# EAGLE board InkTime_board (EAGLE 9.7.0)
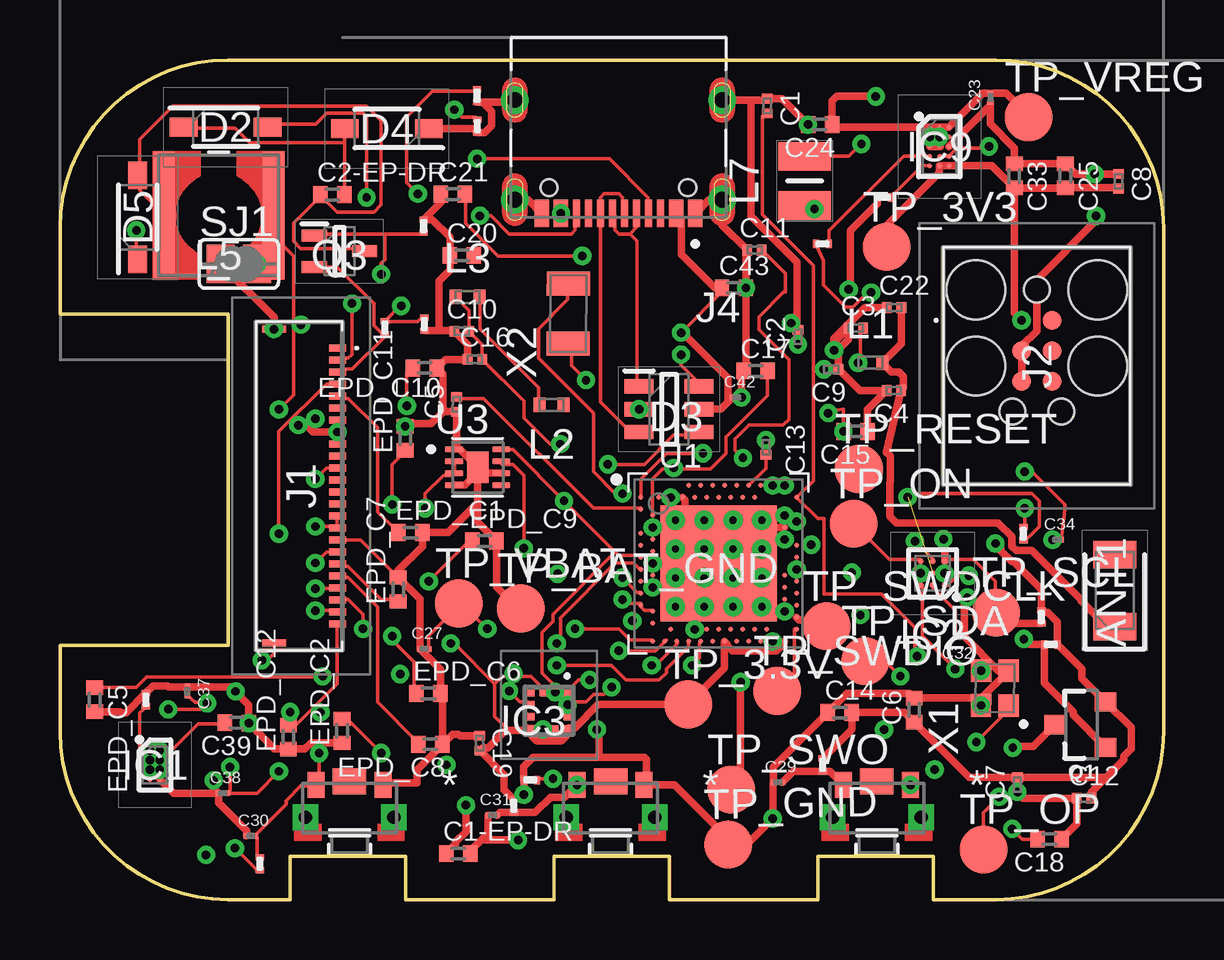
[diagram p0: board, top side]
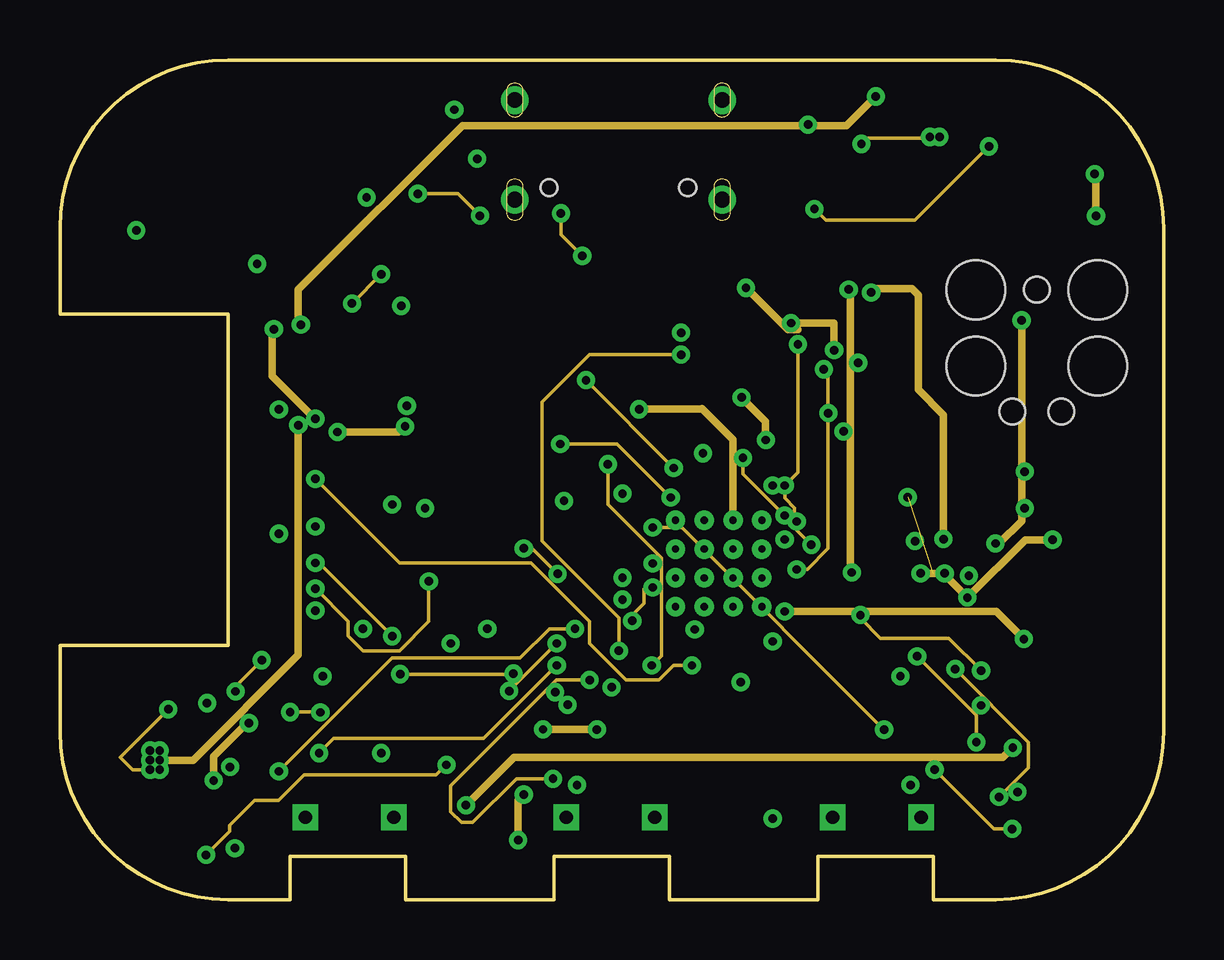
[diagram p1: board, inner layer Route2]
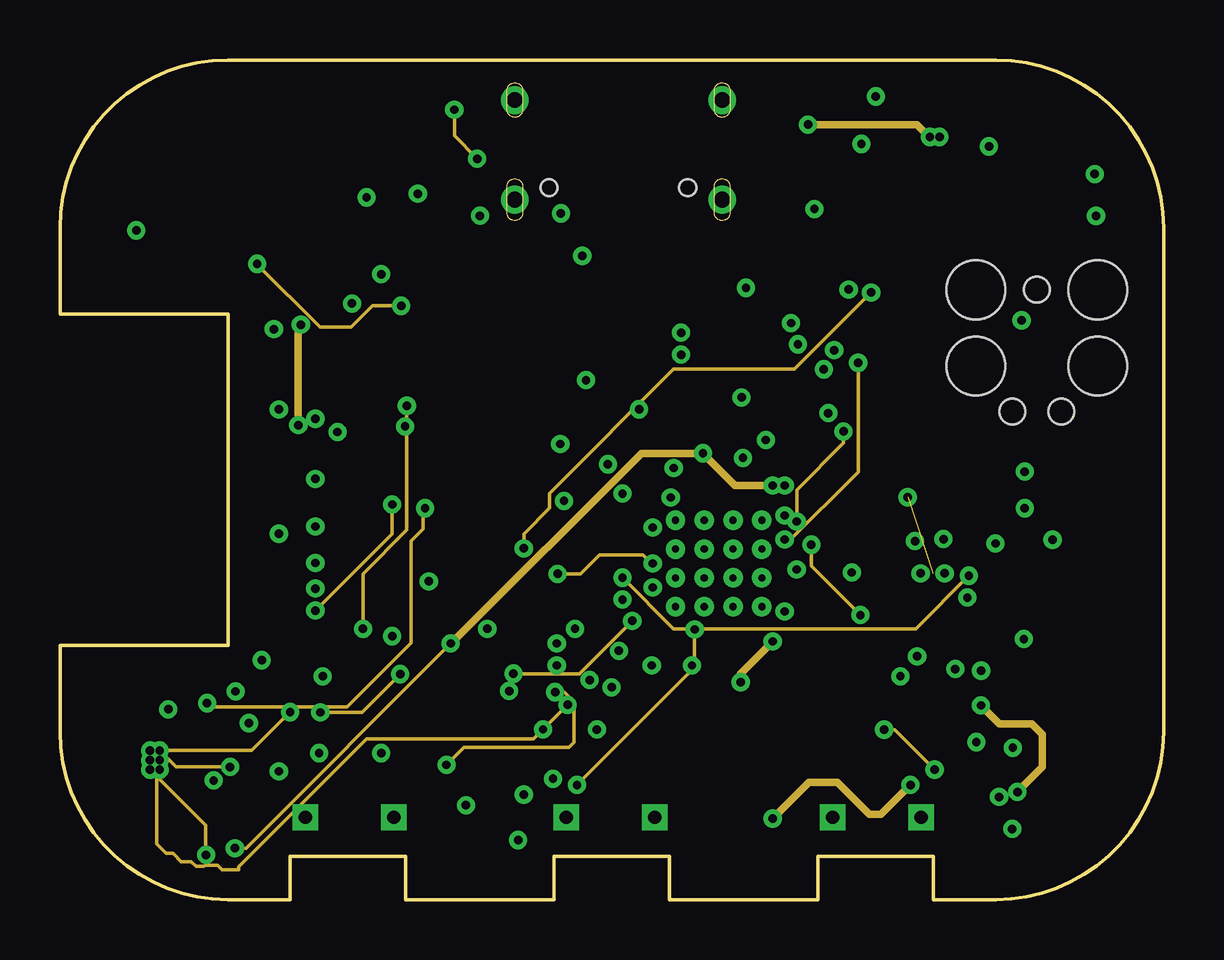
[diagram p2: board, inner layer Route15]
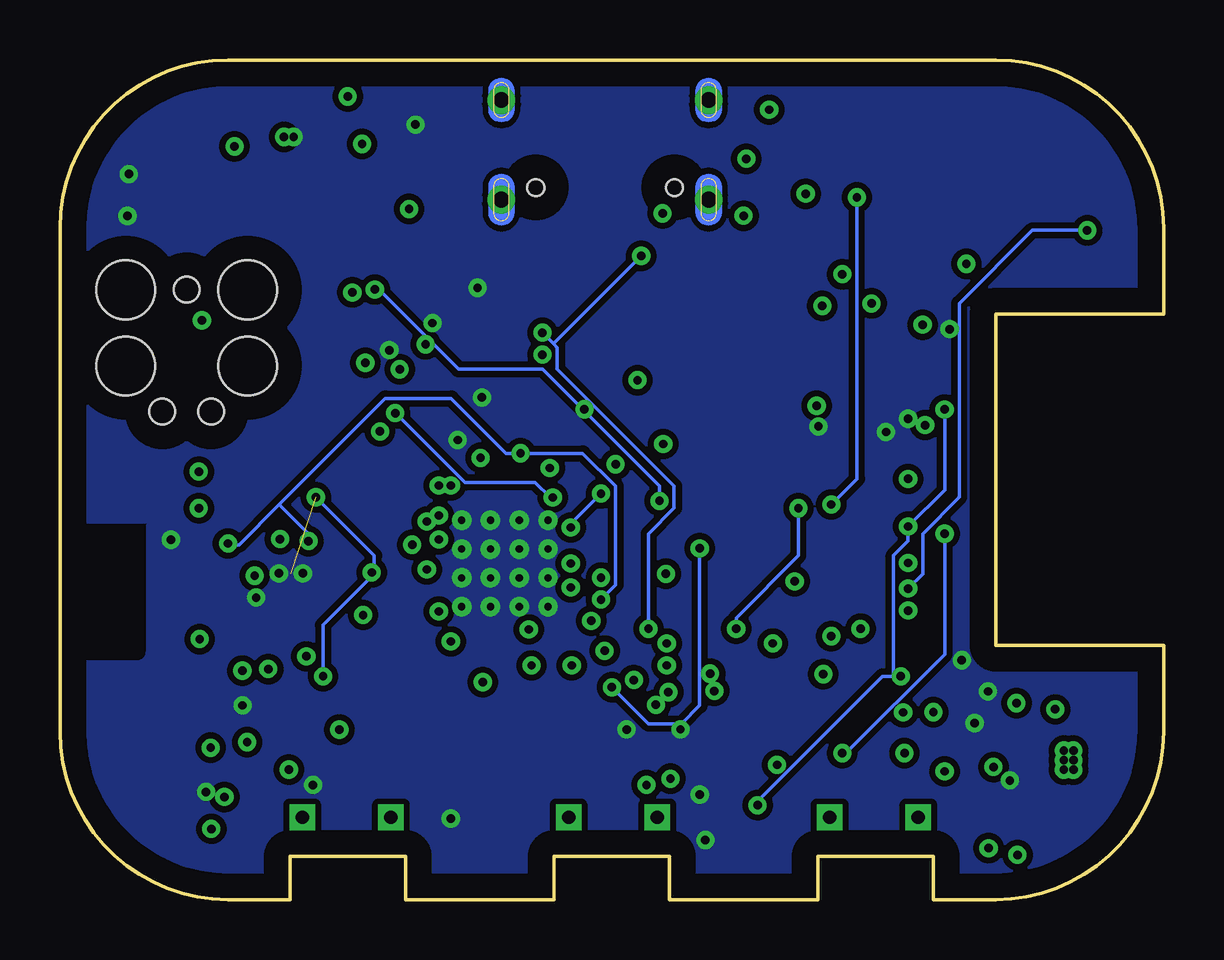
[diagram p3: board, bottom side, seen from below]

Size 46 x 35 mm. Coordinates in mm from the lower left corner, seen from the top.
Outline: 39,0 36.4,0 36.4,1.8 31.6,1.8 31.6,0 25.4,0 25.4,1.8 20.6,1.8 20.6,0 14.4,0 14.4,1.8 9.6,1.8 9.6,0 7,0 arc-90 0,7 0,10.6 7,10.6 7,24.4 0,24.4 0,28 arc-90 7,35 39,35 arc-90 46,28 46,7 arc-90 39,0
Copper layers (1+2*15+16): Top 0.035mm / dielectric 1.5mm / Route2 0.035mm / dielectric 0.15mm / Route15 0.035mm / dielectric 0.2mm / Bottom 0.035mm
Design rules "Fusion Electronics Design Rules *": minimum track width 6mil, minimum drill 0.35mm, track to track 6mil, track to pad 6mil, pad to pad 6mil, via to via 6mil, smd to smd 6mil, copper to edge 40mil, drill to drill 6mil, minimum pad ring 10mil, minimum via ring 8mil, stop-mask expansion 4mil, vias tented up to drill 9999mil, thermal gap 10mil

## Footprints (pad centres in the part's own frame; a part is rotated, then mirrored left to right if it is on the bottom)
2450AT18B100E_ANTC3216X140N = smd 1.15 x 1.8: 1 -1.5,0; 2 1.5,0
NORDIC_NRF_3_RESC0201_N = smd 0.4 x 0.45: 1 -0.305,0; 2 0.305,0
PERFECT_0402_0402 = smd 0.6 x 0.7: 1 -0.5,0; 2 0.5,0
GRM011R60J152KE01L_2_CAPC0201X13N = smd 0.22 x 0.23: 1 -0.185,0; 2 0.185,0
ESP32_C6_LIBRARY_5_SOD3716X135N = smd 1.15 x 0.8: 1 -1.75,0; 2 1.75,0
ESP32_C6_LIBRARY_3_SOT95P280X145-6N = smd 1.2 x 0.6: 1 -1.25,0.95; 2 -1.25,0; 3 -1.25,-0.95; 4 1.25,-0.95; 5 1.25,0; 6 1.25,0.95
BQ25180YBGR_BGA8C40P2X4_100X155X50 = smd 0.2 x 0.2: A1 -0.2,0.6; A2 0.2,0.6; B1 -0.2,0.2; B2 0.2,0.2; C1 -0.2,-0.2; C2 0.2,-0.2; D1 -0.2,-0.6; D2 0.2,-0.6
DRV2605YZFR_BGA9C50P3X3_144X144X62 = smd 0.25 x 0.25: A1 -0.5,0.5; A2 0,0.5; A3 0.5,0.5; B1 -0.5,0; B2 0,0; B3 0.5,0; C1 -0.5,-0.5; C2 0,-0.5; C3 0.5,-0.5
BMA423_BMA423 = smd 0.3 x 0.35: 1 -0.75,-0.775; 2 -0.25,-0.775; 3 0.25,-0.775; 4 0.75,-0.775; 7 0.75,0.775; 8 0.25,0.775; 9 -0.25,0.775; 10 -0.75,0.775 | smd 0.35 x 0.3: 5 0.775,-0.25; 6 0.775,0.25; 11 -0.775,0.25; 12 -0.775,-0.25
RT6160AWSC_BGA15C40P3X5_140X230X60 = smd 0.216 x 0.216: A1 -0.4,0.8; A2 0,0.8; A3 0.4,0.8; B1 -0.4,0.4; B2 0,0.4; B3 0.4,0.4; C1 -0.4,0; C2 0,0; C3 0.4,0; D1 -0.4,-0.4; D2 0,-0.4; D3 0.4,-0.4; E1 -0.4,-0.8; E2 0,-0.8; E3 0.4,-0.8
503480-2400_5034802400 = smd 0.3 x 0.7: 1 -5.75,1.525; 2 -5.25,1.525; 3 -4.75,1.525; 4 -4.25,1.525; 5 -3.75,1.525; 6 -3.25,1.525; 7 -2.75,1.525; 8 -2.25,1.525; 9 -1.75,1.525; 10 -1.25,1.525; 11 -0.75,1.525; 12 -0.25,1.525; 13 0.25,1.525; 14 0.75,1.525; 15 1.25,1.525; 16 1.75,1.525; 17 2.25,1.525; 18 2.75,1.525; 19 3.25,1.525; 20 3.75,1.525; 21 4.25,1.525; 22 4.75,1.525; 23 5.25,1.525; 24 5.75,1.525 | smd 0.3 x 1: MP1 -6.54,-1.125; MP2 6.54,-1.125
TC2030-IDC_TC2030IDC = smd 0.783 x 0.783: 1 -0.953,-0.635; 2 -0.953,0.635; 3 0.317,-0.635; 4 0.317,0.635; 5 1.588,-0.635; 6 1.588,0.635 | hole 2.451: -2.223,-2.54; -2.223,2.54; 0.952,-2.54; 0.952,2.54 | hole 1.067: -2.223,0; 2.857,-1.016; 2.857,1.016
KH-TYPE-C-16P_KINGHELM_KH-TYPE-C-16P = smd 0.6 x 1.15: A1_B12 -3.2,4.725; A4_B9 -2.4,4.725; A9_B4 2.4,4.725; A12_B1 3.2,4.725 | smd 0.3 x 1.15: A5 -1.25,4.725; A6 -0.25,4.725; A7 0.25,4.725; A8 1.25,4.725; B5 1.75,4.725; B6 0.75,4.725; B7 -0.75,4.725; B8 -1.75,4.725 | drill 0.65 pad 1.05: SH1 -4.32,0; SH2 4.32,0; SH3 -4.32,4.15; SH4 4.32,4.15 | hole 0.7: -2.89,3.65; 2.89,3.65
NORDIC_NRF_2_RESC0402_L = smd 0.5 x 0.6: 1 -0.5,0; 2 0.5,0
ESP32_C6_LIBRARY_2_IND_4828-WE-TPC_WRE = smd 0.9 x 5.3: 1 -2.286,0; 2 2.286,0
MLP2016SR47MT0S1_INDC2016X100N = smd 1.2 x 2.2: 1 -1.028,0; 2 1.028,0
ESP32_C6_LIBRARY_4_ESP32_C6_LIBRARY_4_ESP32_C6_LIBRARY_4_ESP32_C6_LIBRARY_4_ESP32_WROVER_SPARKFUN-DISCRETESEMI_SOT23-3 = smd 0.8 x 0.9: 1 -0.95,-1; 2 0.95,-1; 3 0,1.1
ESP32_C6_LIBRARY_6_SOT65P210X110-3N = smd 1.05 x 0.5: 1 -1.05,0.65; 2 -1.05,-0.65; 3 1.05,0
CPF0201D7K68C1_0201 = smd 0.35 x 0.25: 1 0,0.275; 2 0,-0.275
ESP32_C6_LIBRARY_7_JUMPER_SJ = smd 1.168 x 1.6: 1 -0.762,0; 2 0.762,0
2025-10-22_07-23-44_LIBRARY_SW_EVP-AKE31A_PAN = smd 0.711 x 1.092: 1 -1.4,-0.972; 2 1.4,-0.972 | drill 0.559 pad 0.914 square: 3 -1.848,0.381; 4 1.848,0.381 | smd 1.397 x 1.092: 5 0,-1.124
HECTOR_WATCH_1_TP20R = smd 2 x 2: TP 0,0
NORDIC_NRF_4_AQFN50P700X700X85_HS-74N = smd 4.85 x 4.85: P$74 0,0 | drill 0.3 pad 0.6: P$75 -1.8,1.8; P$76 -0.6,1.8; P$77 0.6,1.8; P$78 1.8,1.8; P$79 -1.8,0.6; P$80 -0.6,0.6; P$81 0.6,0.6; P$82 1.8,0.6; P$83 -1.8,-0.6; P$84 -0.6,-0.6; P$85 0.6,-0.6; P$86 1.8,-0.6; P$87 -1.8,-1.8; P$88 -0.6,-1.8; P$89 0.6,-1.8; P$90 1.8,-1.8 | smd 0.2 x 0.2: P$A8 -1.25,3.25; P$A10 -0.75,3.25; P$A12 -0.25,3.25; P$A14 0.25,3.25; P$A16 0.75,3.25; P$A18 1.25,3.25; P$A20 1.75,3.25; P$A22 2.25,3.25; P$A23 2.75,3.25; P$AA24 3.25,-2.25; P$AB2 -2.75,-2.5; P$AC5 -2,-2.75; P$AC9 -1,-2.75; P$AC11 -0.5,-2.75; P$AC13 0,-2.75; P$AC15 0.5,-2.75; P$AC17 1,-2.75; P$AC19 1.5,-2.75; P$AC21 2,-2.75; P$AC24 3.25,-2.75; P$AD2 -2.75,-3.25; P$AD4 -2.25,-3.25; P$AD6 -1.75,-3.25; P$AD8 -1.25,-3.25; P$AD10 -0.75,-3.25; P$AD12 -0.25,-3.25; P$AD14 0.25,-3.25; P$AD16 0.75,-3.25; P$AD18 1.25,-3.25; P$AD20 1.75,-3.25; P$AD22 2.25,-3.25; P$AD23 2.75,-3.25; P$B1 -3.25,2.75; P$B3 -2.5,2.75; P$B5 -2,2.75; P$B7 -1.5,2.75; P$B9 -1,2.75; P$B11 -0.5,2.75; P$B13 0,2.75; P$B15 0.5,2.75; P$B17 1,2.75; P$B19 1.5,2.75; P$B24 3.25,2.75; P$C1 -3.25,2.25; P$D2 -2.75,2; P$D23 2.75,2; P$E24 3.25,1.75; P$F2 -2.75,1.5; P$F23 2.75,1.5; P$G1 -3.25,1.25; P$H2 -2.75,1; P$H23 2.75,1; P$J1 -3.25,0.75; P$J24 3.25,0.75; P$K2 -2.75,0.5; P$L1 -3.25,0.25; P$L24 3.25,0.25; P$M2 -2.75,0; P$N1 -3.25,-0.25; P$N24 3.25,-0.25; P$P2 -2.75,-0.5; P$P23 2.75,-0.5; P$R1 -3.25,-0.75; P$R24 3.25,-0.75; P$T2 -2.75,-1; P$T23 2.75,-1; P$U1 -3.25,-1.25; P$U24 3.25,-1.25; P$V23 2.75,-1.5; P$W1 -3.25,-1.75; P$W24 3.25,-1.75; P$Y2 -2.75,-2; P$Y23 2.75,-2
ESP32_C6_LIBRARY_SON50P200X200X80-9N = smd 0.76 x 0.27: 1 -0.985,0.75; 2 -0.985,0.25; 3 -0.985,-0.25; 4 -0.985,-0.75; 5 0.985,-0.75; 6 0.985,-0.25; 7 0.985,0.25; 8 0.985,0.75 | smd 0.9 x 1.3: 9 0,0
NORDIC_NRF_BT-XTAL_2016_N = smd 0.95 x 0.85: 1 -0.725,-0.575; 2 0.725,-0.575; 3 0.725,0.575; 4 -0.725,0.575
NORDIC_NRF_1_XTAL_3215_N = smd 1 x 1.8: 1 -1.25,0; 2 1.25,0

## Placement (x,y rotation side)
ANT1  2450AT18B100E_2450AT18B100E  [2450AT18B100E_ANTC3216X140N]  43.97,12.88 90 top
C1  12pF  [NORDIC_NRF_3_RESC0201_N]  29.48,33.08 270 top
C1-EP-DR  10uF  [PERFECT_0402_0402]  16.6,1.92 0 top
C2  12pF  [NORDIC_NRF_3_RESC0201_N]  30.76,23.45 90 top
C2-EP-DR  4.7uF/25V  [PERFECT_0402_0402]  11.35,29.39 0 top
C3  1pF  [NORDIC_NRF_3_RESC0201_N]  33.17,23.82 0 top
C4  1pF  [NORDIC_NRF_3_RESC0201_N]  34.76,21.22 180 top
C5  100nF  [NORDIC_NRF_3_RESC0201_N]  16.53,20.65 89.6 top
C6  4.7µF  [PERFECT_0402_0402]  35.6,7.9 90 top
C7  100nF  [NORDIC_NRF_3_RESC0201_N]  39.91,4.79 90 top
C8  100nF  [NORDIC_NRF_3_RESC0201_N]  44.13,29.94 270 top
C9  820pF  [NORDIC_NRF_3_RESC0201_N]  32.14,22.11 180 top
C10  N.C.  [NORDIC_NRF_3_RESC0201_N]  16.75,23.69 0 top
C11  100pF  [NORDIC_NRF_3_RESC0201_N]  28.95,27.07 0 top
C12  100nF  [NORDIC_NRF_3_RESC0201_N]  42.68,4.23 0 top
C13  N.C.  [NORDIC_NRF_3_RESC0201_N]  29.42,18.85 270 top
C14  4.7µF  [PERFECT_0402_0402]  32.51,7.8 0 top
C15  1.0µF  [PERFECT_0402_0402]  33.16,19.52 180 top
C16  47nF  [NORDIC_NRF_3_RESC0201_N]  17.3,22.52 0 top
C17  12pF  [PERFECT_0402_0402]  29,22.04 0 top
C18  12pF  [PERFECT_0402_0402]  41.25,2.52 180 top
C19  100nF  [NORDIC_NRF_3_RESC0201_N]  17.5,6.52 270.7 top
C20  4.7µF  [PERFECT_0402_0402]  16.75,26.86 0 top
C21  4.7µF  [PERFECT_0402_0402]  16.38,29.41 0 top
C22  N.C.  [NORDIC_NRF_3_RESC0201_N]  34.77,24.68 0 top
C23  0.1uF  [GRM011R60J152KE01L_2_CAPC0201X13N]  38.78,33.42 90 top
C24  10uF  [PERFECT_0402_0402]  31.68,32.31 180 top
C25  22uF  [PERFECT_0402_0402]  41.91,30.17 270 top
C27  0.1uF  [GRM011R60J152KE01L_2_CAPC0201X13N]  15.19,10.45 0 top
C29  1uF  [GRM011R60J152KE01L_2_CAPC0201X13N]  29.93,4.88 1.1 top
C30  1uF  [GRM011R60J152KE01L_2_CAPC0201X13N]  7.96,2.65 0 top
C31  1uF  [GRM011R60J152KE01L_2_CAPC0201X13N]  18.04,3.51 0 top
C32  1uF  [GRM011R60J152KE01L_2_CAPC0201X13N]  37.51,10.96 180 top
C33  22uF  [PERFECT_0402_0402]  39.78,30.16 270 top
C34  0.1uF  [GRM011R60J152KE01L_2_CAPC0201X13N]  41.56,15 0 top
C37  1uF  [GRM011R60J152KE01L_2_CAPC0201X13N]  5.31,8.69 270 top
C38  1uF  [GRM011R60J152KE01L_2_CAPC0201X13N]  6.79,4.43 0 top
C39  10uF  [PERFECT_0402_0402]  7.37,7.36 178.8 top
C42  0.1uF  [GRM011R60J152KE01L_2_CAPC0201X13N]  28.22,20.93 0 top
C43  4.7uF  [PERFECT_0402_0402]  28.09,25.5 0 top
D2  MBR0530  [ESP32_C6_LIBRARY_5_SOD3716X135N]  6.91,32.2 0 top
D3  USBLC6-2SC6Y  [ESP32_C6_LIBRARY_3_SOT95P280X145-6N]  25.39,20.44 0 top
D4  MBR0530  [ESP32_C6_LIBRARY_5_SOD3716X135N]  13.63,32.14 180 top
D5  MBR0530  [ESP32_C6_LIBRARY_5_SOD3716X135N]  3.25,28.44 90 top
EPD_C1  1uF/50V  [PERFECT_0402_0402]  14.61,15.3 0 top
EPD_C2  1uF/50V  [PERFECT_0402_0402]  11.76,7.03 90 top
EPD_C5  0.1uF/50V  [PERFECT_0402_0402]  1.45,8.33 270 top
EPD_C6  1uF/50V  [PERFECT_0402_0402]  15.35,8.6 0 top
EPD_C7  1uF/50V  [PERFECT_0402_0402]  14.1,12.93 90 top
EPD_C8  1uF/50V  [PERFECT_0402_0402]  15.44,6.47 180 top
EPD_C9  1uF/50V  [PERFECT_0402_0402]  17.69,14.95 0 top
EPD_C10  1uF/50V  [PERFECT_0402_0402]  15.21,22.16 180 top
EPD_C11  1uF/50V  [PERFECT_0402_0402]  14.39,19.23 90 top
EPD_C12  1uF/50V  [PERFECT_0402_0402]  9.52,6.77 90 top
IC1  BQ25180YBGR  [BQ25180YBGR_BGA8C40P2X4_100X155X50]  3.96,5.61 0 top
IC2  DRV2605YZFR  [DRV2605YZFR_BGA9C50P3X3_144X144X62]  36.38,13.6 180 top
IC3  BMA423  [BMA423_BMA423]  20.39,7.87 179.9 top
IC9  RT6160AWSC  [RT6160AWSC_BGA15C40P3X5_140X230X60]  36.66,31.39 0 top
J1  503480-2400  [503480-2400_5034802400]  10.04,17.24 270 top
J2  TC2030-IDC  [TC2030-IDC_TC2030IDC]  40.72,23.19 270 top
J4  KH-TYPE-C-16P  [KH-TYPE-C-16P_KINGHELM_KH-TYPE-C-16P]  23.28,33.33 180 top
L1  3.9nH  [NORDIC_NRF_2_RESC0402_L]  33.77,22.38 0 top
L2  3.9nH  [NORDIC_NRF_2_RESC0402_L]  20.48,20.62 180 top
L3  3.9nH  [NORDIC_NRF_2_RESC0402_L]  16.99,25.12 0 top
L5  68uH  [ESP32_C6_LIBRARY_2_IND_4828-WE-TPC_WRE]  6.61,28.52 180 top
L7  FTC252012SR47MBCA  [MLP2016SR47MT0S1_INDC2016X100N]  31.04,29.95 270 top
Q1  20V/4.2A/52mΩ/1.4W  [ESP32_C6_LIBRARY_4_ESP32_C6_LIBRARY_4_ESP32_C6_LIBRARY_4_ESP32_C6_LIBRARY_4_ESP32_WROVER_SPARKFUN-DISCRETESEMI_SOT23-3]  42.58,7.29 90 top
Q3  SI1308EDL-T1-GE3  [ESP32_C6_LIBRARY_6_SOT65P210X110-3N]  11.65,27.02 0 top
R1_EP_DR  0.47  [CPF0201D7K68C1_0201]  13.54,23.84 0 top
R1_USB  5K1  [CPF0201D7K68C1_0201]  17.39,32.23 0 top
R2  0  [CPF0201D7K68C1_0201]  34.36,29.28 90 top
R2_EP_DR  10K  [CPF0201D7K68C1_0201]  15.16,28.07 0 top
R2_USB  5K1  [CPF0201D7K68C1_0201]  17.38,33.51 0 top
R3  0  [CPF0201D7K68C1_0201]  19.61,4.99 90 top
R4  0  [CPF0201D7K68C1_0201]  31.78,27.33 90 top
R5  10K  [CPF0201D7K68C1_0201]  8.33,1.49 0 top
R7  10K  [CPF0201D7K68C1_0201]  31.8,5.62 180 top
R8  10K  [CPF0201D7K68C1_0201]  18.91,3.9 180.5 top
R9  10K  [CPF0201D7K68C1_0201]  3.58,8.33 0 top
R17  3K3  [CPF0201D7K68C1_0201]  40.91,11.78 0 top
R18  3K3  [CPF0201D7K68C1_0201]  40.16,15.25 0 top
R_PWR_EPD  10K  [CPF0201D7K68C1_0201]  41.31,10.63 90 top
R_TYPE_SEL  2.2  [CPF0201D7K68C1_0201]  15.19,23.98 180.7 top
SJ1  [ESP32_C6_LIBRARY_7_JUMPER_SJ]  7.46,26.5 0 top
SW_DN  2025-10-22_07-23-44_LIBRARY_EVP-AKE31ASW_EVP-AKE31A_PAN  [2025-10-22_07-23-44_LIBRARY_SW_EVP-AKE31A_PAN]  34.05,3.81 180 top
SW_ENT  2025-10-22_07-23-44_LIBRARY_EVP-AKE31ASW_EVP-AKE31A_PAN  [2025-10-22_07-23-44_LIBRARY_SW_EVP-AKE31A_PAN]  22.95,3.81 180 top
SW_UP  2025-10-22_07-23-44_LIBRARY_EVP-AKE31ASW_EVP-AKE31A_PAN  [2025-10-22_07-23-44_LIBRARY_SW_EVP-AKE31A_PAN]  12.07,3.81 180 top
TP_3.3V  HECTOR_WATCH_1_TPTP20R  [HECTOR_WATCH_1_TP20R]  26.18,8.14 0 top
TP_3V3  HECTOR_WATCH_1_TPTP20R  [HECTOR_WATCH_1_TP20R]  34.45,27.2 0 top
TP_BAT_GND  HECTOR_WATCH_1_TPTP20R  [HECTOR_WATCH_1_TP20R]  19.21,12.14 0 top
TP_GND  HECTOR_WATCH_1_TPTP20R  [HECTOR_WATCH_1_TP20R]  27.85,2.3 1 top
TP_ON  HECTOR_WATCH_1_TPTP20R  [HECTOR_WATCH_1_TP20R]  33.08,15.66 0 top
TP_OP  HECTOR_WATCH_1_TPTP20R  [HECTOR_WATCH_1_TP20R]  38.49,2.09 0 top
TP_RESET  HECTOR_WATCH_1_TPTP20R  [HECTOR_WATCH_1_TP20R]  33.3,17.95 0 top
TP_SCL  HECTOR_WATCH_1_TPTP20R  [HECTOR_WATCH_1_TP20R]  39.02,11.97 0 top
TP_SDA  HECTOR_WATCH_1_TPTP20R  [HECTOR_WATCH_1_TP20R]  33.56,9.95 0 top
TP_SWDCLK  HECTOR_WATCH_1_TPTP20R  [HECTOR_WATCH_1_TP20R]  31.96,11.39 0 top
TP_SWDIO  HECTOR_WATCH_1_TPTP20R  [HECTOR_WATCH_1_TP20R]  29.9,8.7 0 top
TP_SWO  HECTOR_WATCH_1_TPTP20R  [HECTOR_WATCH_1_TP20R]  27.98,4.58 0 top
TP_VBAT  HECTOR_WATCH_1_TPTP20R  [HECTOR_WATCH_1_TP20R]  16.63,12.34 0 top
TP_VREG  HECTOR_WATCH_1_TPTP20R  [HECTOR_WATCH_1_TP20R]  40.37,32.61 0 top
U1  NORDIC_NRF_4_NRF52840_QF  [NORDIC_NRF_4_AQFN50P700X700X85_HS-74N]  27.46,14.01 0 top
U3  MAX17048G+T10  [ESP32_C6_LIBRARY_SON50P200X200X80-9N]  17.41,18.02 0 top
X1  32MHz  [NORDIC_NRF_BT-XTAL_2016_N]  38.97,8.82 89.7 top
X2  32.768kHz  [NORDIC_NRF_1_XTAL_3215_N]  21.18,24.42 89.7 top

## Library data of the parts
ANT1 = InkTime_v5; ARROW_PART_NUMBER: 2450AT18B100E; ARROW_PRICE-STOCK: https://www.arrow.com/en/products/2450at18b100e/johanson-dielectrics?utm_currency=USD&region=nac; DESCRIPTION: Antennas 2.45GHz ANTENNA; HEIGHT: 1.4mm; MANUFACTURER_NAME: JOHANSON TECHNOLOGY; MANUFACTURER_PART_NUMBER: 2450AT18B100E; MOUSER_PART_NUMBER: 609-2450AT18B100E; MOUSER_PRICE-STOCK: https://www.mouser.co.uk/ProductDetail/Johanson-Technology/2450AT18B100E?qs=yCnrNFeXz%252Bh5MFsFIXGZGA%3D%3D
C1 C1-EP-DR C2 C2-EP-DR C3-C22 C24 C25 C33 C39 C43 EPD_C1 EPD_C2 EPD_C5-EPD_C12 L1-L3 R1_EP_DR R1_USB R2 R2_EP_DR R2_USB R3-R5 R7-R9 R17 R18 R_PWR_EPD R_TYPE_SEL SJ1 TP_3.3V TP_3V3 TP_BAT_GND TP_GND TP_ON TP_OP TP_RESET TP_SCL TP_SDA TP_SWDCLK TP_SWDIO TP_SWO TP_VBAT TP_VREG U1 X1 X2 = InkTime_v5
C23 C27 C29-C32 C34 C37 C38 C42 = InkTime_v5; AVAILABILITY: In Stock; CHECK_PRICES: https://www.snapeda.com/parts/GRM011R60J152KE01L/Murata/view-part/?ref=eda; DESCRIPTION: SMD Capacitor X5R(EIA) with Capacitance: 1500pF Tol. 10%. Rated Voltage: 6.3Vdc; MF: Murata; MP: GRM011R60J152KE01L; PACKAGE: 0201 Murata; PRICE: None; SNAPEDA_LINK: https://www.snapeda.com/parts/GRM011R60J152KE01L/Murata/view-part/?ref=snap
D2 D4 D5 = InkTime_v5; AVAILABILITY: In Stock; CHECK_PRICES: https://www.snapeda.com/parts/MBR0530/Onsemi/view-part/?ref=eda; DESCRIPTION: Diode Schottky 30 V 500mA Surface Mount SOD-123; MF: ON Semiconductor; MP: MBR0530; PACKAGE: SOD-123-2 ON Semiconductor; PRICE: None; PURCHASE-URL: https://www.snapeda.com/api/url_track_click_mouser/?unipart_id=179458&manufacturer=ON Semiconductor&part_name=MBR0530&search_term=None; SNAPEDA_LINK: https://www.snapeda.com/parts/MBR0530/Onsemi/view-part/?ref=snap
D3 = InkTime_v5; AVAILABILITY: In Stock; CHECK_PRICES: https://www.snapeda.com/parts/USBLC6-2SC6Y/STMicroelectronics/view-part/?ref=eda; DESCRIPTION: 17V Clamp 5A (8/20µs) Ipp Tvs Diode Surface Mount SOT-23-6; MF: STMicroelectronics; MP: USBLC6-2SC6Y; PACKAGE: SOT-23-6 STMicroelectronics; PRICE: None; SNAPEDA_LINK: https://www.snapeda.com/parts/USBLC6-2SC6Y/STMicroelectronics/view-part/?ref=snap
IC1 = InkTime_v5; ARROW_PART_NUMBER: BQ25180YBGR; ARROW_PRICE-STOCK: https://www.arrow.com/en/products/bq25180ybgr/texas-instruments?utm_currency=USD&region=nac; DESCRIPTION: Charger IC Lithium Ion/Polymer, Lithium Iron Phosphate 8-DSBGA (1.6x1.1); HEIGHT: 0.5mm; MANUFACTURER_NAME: Texas Instruments; MANUFACTURER_PART_NUMBER: BQ25180YBGR; MOUSER_PART_NUMBER: 595-BQ25180YBGR; MOUSER_PRICE-STOCK: https://www.mouser.co.uk/ProductDetail/Texas-Instruments/BQ25180YBGR?qs=doiCPypUmgEWjAK%252BJAX6Tw%3D%3D
IC2 = InkTime_v5; ARROW_PART_NUMBER: DRV2605YZFR; ARROW_PRICE-STOCK: https://www.arrow.com/en/products/drv2605yzfr/texas-instruments?region=nac; DESCRIPTION: Haptic Driver for ERM/LRA with Built-In Library and Smart Loop Architecture; HEIGHT: 0.625mm; MANUFACTURER_NAME: Texas Instruments; MANUFACTURER_PART_NUMBER: DRV2605YZFR
IC3 = InkTime_v5; ARROW_PART_NUMBER: BMA423; ARROW_PRICE-STOCK: https://www.arrow.com/en/products/bma423/bosch; DESCRIPTION: Accelerometers Triaxial low-g 12bit Acceleration Sensor; HEIGHT: 1mm; MANUFACTURER_NAME: BOSCH; MANUFACTURER_PART_NUMBER: BMA423; MOUSER_PART_NUMBER: 262-BMA423; MOUSER_PRICE-STOCK: https://www.mouser.co.uk/ProductDetail/Bosch-Sensortec/BMA423?qs=HXFqYaX1Q2xC%252BSgeGoX3mg%3D%3D
IC9 = InkTime_v5; DESCRIPTION: Buck-Boost Regulator Positive Output Step-Up/Step-Down I2C DC-DC Controller IC 15-WL-CSP (BSC) (1.4x2.3); HEIGHT: 0.6mm; MANUFACTURER_NAME: RICHTEK; MANUFACTURER_PART_NUMBER: RT6160AWSC; MOUSER_PART_NUMBER: 835-RT6160AWSC; MOUSER_PRICE-STOCK: https://www.mouser.co.uk/ProductDetail/Richtek/RT6160AWSC?qs=amGC7iS6iy%2FLd9PSoixZXQ%3D%3D
J1 = InkTime_v5; DESCRIPTION: FFC & FPC Connectors 0.5mm FPC RA SMT Dual Contact 24Ckt; HEIGHT: 1.87mm; MANUFACTURER_NAME: Molex; MANUFACTURER_PART_NUMBER: 503480-2400; MOUSER_PART_NUMBER: 538-503480-2400; MOUSER_PRICE-STOCK: https://www.mouser.co.uk/ProductDetail/Molex/503480-2400?qs=OAhjpuo3Vu7efIoxFh9AOw%3D%3D
J2 = InkTime_v5; DESCRIPTION: CABLE ADAPTER 6 POS; HEIGHT: 19mm; MANUFACTURER_NAME: Tag Connect; MANUFACTURER_PART_NUMBER: TC2030-IDC
J4 = InkTime_v5; AVAILABILITY: Not in stock; CHECK_PRICES: https://www.snapeda.com/parts/KH-TYPE-C-16P/Kinghelm/view-part/?ref=eda; MF: kinghelm; MP: KH-TYPE-C-16P; PACKAGE: None; PRICE: None; SNAPEDA_LINK: https://www.snapeda.com/parts/KH-TYPE-C-16P/Kinghelm/view-part/?ref=snap
L5 = InkTime_v5; COPYRIGHT: Copyright (C) 2024 Ultra Librarian. All rights reserved.; MANUFACTURER_PART_NUMBER: 744043680; MFR_NAME: Wurth Electronics
L7 = InkTime_v5; DESCRIPTION: SMD / SMT Inductors (Coils), L=0.47?H, L x W x T :; HEIGHT: 1mm; JLCPCB: https://jlcpcb.com/partdetail/6763488-FTC252012SR47MBCA/C5832368; MANUFACTURER_NAME: TDK; MANUFACTURER_PART_NUMBER: FTC252012SR47MBCA
Q1 = InkTime_v5; PROD_ID: TRAN-14388
Q3 = InkTime_v5; AVAILABILITY: In Stock; CHECK_PRICES: https://www.snapeda.com/parts/SI1308EDL-T1-GE3/Vishay+Siliconix/view-part/?ref=eda; DESCRIPTION: Si1308EDL-T1-GE3 N-channel MOSFET Transistor, 1.5 A, 30 V, 3-Pin SC-70 | Siliconix / Vishay SI1308EDL-T1-GE3; MF: Vishay Siliconix; MP: SI1308EDL-T1-GE3; PACKAGE: SOT-323 Vishay Semiconductor; PRICE: None; PURCHASE-URL: https://www.snapeda.com/api/url_track_click_mouser/?unipart_id=274603&manufacturer=Vishay Siliconix&part_name=SI1308EDL-T1-GE3&search_term=None; SNAPEDA_LINK: https://www.snapeda.com/parts/SI1308EDL-T1-GE3/Vishay+Siliconix/view-part/?ref=snap
SW_DN SW_ENT SW_UP = InkTime_v5; COPYRIGHT: Copyright (C) 2025 Ultra Librarian. All rights reserved.; DIGI-KEY_PART_NUMBER_1: P123437TR-ND; DIGI-KEY_PART_NUMBER_2: P123437CT-ND; DIGI-KEY_PART_NUMBER_3: P123437DKR-ND; MANUFACTURER_NAME: Panasonic; MANUFACTURER_PART_NUMBER: EVP-AKE31A
U3 = InkTime_v5; AVAILABILITY: In Stock; CHECK_PRICES: https://www.snapeda.com/parts/MAX17048G+T10/Analog+Devices/view-part/?ref=eda; DESCRIPTION: 3µA 1-Cell/2-Cell Fuel Gauge with ModelGauge; MF: Analog Devices; MP: MAX17048G+T10; PACKAGE: TDFN-8 Maxim; PRICE: None; PURCHASE-URL: https://www.snapeda.com/api/url_track_click_mouser/?unipart_id=329239&manufacturer=Analog Devices&part_name=MAX17048G+T10&search_term=None; SNAPEDA_LINK: https://www.snapeda.com/parts/MAX17048G+T10/Analog+Devices/view-part/?ref=snap

## Nets
3V3: C6.1 C7.2 C8.2 C12.2 C14.2 C19.2 C25.2 C33.2 C34.2 IC2.C2 IC3.3 IC3.7 IC3.10 IC9.E2 IC9.E3 J2.1 Q1.2 R5.2 R7.2 R8.2 R17.1 R18.1 R_PWR_EPD.2 TP_3.3V.TP TP_3V3.TP U1.P$A22 U1.P$AD14 U1.P$AD23 U1.P$B1 U1.P$W1 U1.P$Y2
ALERT: U1.P$J24 U3.5
D+: D3.4 U1.P$AD6
D-: D3.6 U1.P$AD4
DN: D3.1 J4.A7 J4.B7
DP: D3.3 J4.A6 J4.B6
EPD_3V3: C1-EP-DR.1 EPD_C5.1 J1.15 J1.16 L5.1 Q1.3
EPD_BUSY: J1.9 U1.P$AD12
EPD_CS: J1.12 U1.P$K2
EPD_DC: J1.11 U1.P$AD10
EPD_RST: J1.10 U1.P$AC11
GDR: J1.2 Q3.1 R2_EP_DR.2
GND: C1-EP-DR.2 C1.1 C2.2 C3.1 C4.2 C5.1 C6.2 C7.1 C8.1 C9.1 C10.1 C11.1 C12.1 C13.1 C14.1 C15.1 C16.1 C17.1 C18.1 C19.1 C20.1 C21.1 C22.1 C23.1 C24.2 C25.1 C27.1 C29.1 C30.1 C31.1 C32.1 C33.1 C34.1 C37.1 C38.1 C39.1 C42.2 C43.2 D3.2 D4.1 EPD_C1.2 EPD_C2.1 EPD_C5.2 EPD_C6.2 EPD_C7.2 EPD_C8.1 EPD_C9.2 EPD_C10.1 EPD_C11.2 EPD_C12.1 IC1.D2 IC2.B1 IC2.B3 IC3.8 IC3.9 IC9.B1 IC9.C1 IC9.C2 IC9.C3 J1.8 J1.17 J1.MP1 J1.MP2 J2.3 J2.5 J4.A1_B12 J4.A12_B1 J4.SH1 J4.SH2 J4.SH3 J4.SH4 R1_USB.2 R2_EP_DR.1 R2_USB.2 R3.1 R9.1 R_TYPE_SEL.1 SJ1.1 SW_DN.1 SW_ENT.1 SW_UP.1 TP_BAT_GND.TP TP_GND.TP U1.P$74 U1.P$75 U1.P$76 U1.P$77 U1.P$78 U1.P$79 U1.P$80 U1.P$81 U1.P$82 U1.P$83 U1.P$84 U1.P$85 U1.P$86 U1.P$87 U1.P$88 U1.P$89 U1.P$90 U1.P$B7 U1.P$F23 U3.1 U3.4 U3.6 U3.9 X1.2 X1.4
HAPTIC_EN: IC2.A1 U1.P$U1
IMU_INT1: IC3.5 U1.P$N1
IMU_INT2: IC3.6 U1.P$P2
LX1: IC9.B2 IC9.B3 L7.1
LX2: IC9.D2 IC9.D3 L7.2
MOSI: J1.14 U1.P$B13
N$1: C5.2 U1.P$C1
N$2: C17.2 U1.P$D2 X2.1
N$3: C18.2 U1.P$F2 X2.2
N$4: C9.2 U1.P$N24
N$5: ANT1.1 C4.1 C22.2 L1.2
N$6: C3.2 L1.1 U1.P$H23
N$7: C10.2 C15.2 C16.2 L3.1 U1.P$B5 U1.P$E24
N$8: C11.2 U1.P$D23
N$9: C1.2 U1.P$B24 X1.1
N$10: C2.1 U1.P$A23 X1.3
N$11: L2.2 L3.2
N$12: L2.1 U1.P$B3
N$13: IC9.D1 R4.2
N$14: IC9.E1 R2.2
N$16: U1.P$AB2
N$17: C20.2 U1.P$AC5
N$19: J4.A5 R1_USB.1
N$20: C2-EP-DR.1 D5.2 L5.2 Q3.3
N$21: IC1.D1 R9.2
N$22: C2-EP-DR.2 D2.1 D4.2
N$23: EPD_C6.1 J1.18
N$25: EPD_C2.2 J1.4
N$26: R1_EP_DR.1 R_TYPE_SEL.2 SJ1.2
N$28: IC3.1 R3.2
N$29: EPD_C7.1 J1.19
N$30: EPD_C1.1 J1.5
N$31: EPD_C8.2 J1.20
N$32: C13.2 U1.P$A18
N$33: EPD_C10.2 J1.22
N$35: EPD_C12.2 J1.24
N$36: C32.2 IC2.A2
N$41: J4.B5 R2_USB.1
OUT+: IC2.A3 TP_OP.TP
OUT-: IC2.C3 TP_ON.TP
P0.04: U1.P$J1
P0.09: U1.P$L24
P0.13: C30.2 R5.1 SW_UP.2 U1.P$AD8
P0.14: C31.2 R8.1 SW_ENT.2 U1.P$AC9
P0.19: U1.P$AC15
P0.20: U1.P$AD16
P0.21: U1.P$AC17
P0.22: U1.P$AD18
P0.23: U1.P$AC19
P0.24: U1.P$AD20
P0.25: U1.P$AC21
P0.26: U1.P$G1
P0.27: U1.P$H2
P0.28: U1.P$B11
P0.29: U1.P$A10
P0.30: U1.P$B9
P0.31: U1.P$A8
P1.01: Q1.1 R_PWR_EPD.1 U1.P$Y23
P1.02: C29.2 R7.1 SW_DN.2 U1.P$W24
P1.03: U1.P$V23
P1.04: U1.P$U24
P1.05: U1.P$T23
P1.06: U1.P$R24
P1.07: U1.P$P23
P1.09: U1.P$R1
P1.10: U1.P$A20
P1.11: U1.P$B19
P1.12: U1.P$B17
P1.13: U1.P$A16
P1.14: U1.P$B15
P1.15: U1.P$A14
PMIC_INT: IC1.A1 U1.P$T2
PREVGH: D5.1 EPD_C9.1 J1.21
PREVGL: D2.2 EPD_C11.1 J1.23
RESE: J1.3 Q3.2 R1_EP_DR.2
RESET: J2.6 TP_RESET.TP U1.P$AC13
SCK: J1.13 U1.P$A12
SCL: IC1.B1 IC2.C1 IC3.12 R4.1 R17.2 TP_SCL.TP U1.P$M2 U3.7
SDA: IC1.C1 IC2.B2 IC3.2 R2.1 R18.2 TP_SDA.TP U1.P$L1 U3.8
SWDCLK: J2.4 TP_SWDCLK.TP U1.P$AA24
SWDIO: J2.2 TP_SWDIO.TP U1.P$AC24
SWO: TP_SWO.TP U1.P$AD22
VBAT: C27.2 C37.2 IC1.C2 TP_VBAT.TP U3.2 U3.3
VBUS: C21.2 C38.2 C42.1 C43.1 D3.5 IC1.A2 J4.A4_B9 J4.A9_B4 U1.P$AD2
VREG: C23.2 C24.1 C39.2 IC1.B2 IC9.A1 IC9.A2 IC9.A3 TP_VREG.TP

## Tracks (layer width: path | path; a pad name or v marks a point on that pad's centre or on a via)
3V3  (via drill 0.35)
  Top 0.152: 18.12,9 18.42,9.3 19.64,9.3 20.1,8.85 20.1,8.69 IC3.3 | 18.12,9 18.12,7.63 18.57,7.17 18.58,7.05 | U1.P$Y2 24.67,12.05 24.36,12.05 24.21,12.2 U1.P$W1 24.21,12.35 23.6,12.35 v23.45,12.5 | v26.8,18.6 25.28,18.6 24.21,17.53 24.21,16.77 U1.P$B1 | v40.21,17.84 40.52,17.84 41.89,16.47 41.89,16.25 C34.2 | v35.64,14.94 36.4,14.18 IC2.C2 | v7.29,2.14 8.21,1.23 R5.2 | v40.21,16.31 40.21,15.55 R18.1 | 18.12,9 16.44,10.68 v16.29,10.68
  Top 0.305: C33.2 38.85,30.59 IC9.E3 IC9.E2 36.66,30.31 34.45,28.1 TP_3V3.TP | C33.2 C25.2 44.09,29.67 C8.2 | J2.1 39.78,24.45 C33.2 | v39,14.84 39.22,14.62 39.22,14.54 39.67,14.09 39.75,14.09 40.91,12.93 R17.1 41,11.97 41.18,11.97 41.58,11.57 R_PWR_EPD.2 42.6,9.61 42.6,9.23 Q1.2 44.65,7.18 44.65,6.28 44.34,5.96 44.34,5.82 43.61,5.09 | C12.2 42.99,4.47 43.61,5.09 | 43.61,5.09 C7.2 37.91,5.09 C6.1 35.21,7.79 35.13,7.79 35.12,7.8 C14.2 33.01,7.1 R7.2 | 19.68,7.05 19.68,6.79 19.86,6.61 20.91,6.61 21.09,6.79 21.09,7.05 IC3.10 21.21,7.16 21.46,7.16 22.44,8.14 TP_3.3V.TP 27.71,9.66 U1.P$AD14 27.8,10.67 27.8,10.59 28.04,10.36 29.87,10.36 30.11,10.59 30.11,10.67 U1.P$AD23 | 19.68,7.05 IC3.7 | 19.68,7.05 18.58,7.05 17.85,6.32 17.61,6.32 C19.2 18.51,5.2 18.51,4.57 R8.2
  Route2 0.152: v40.21,17.84 40.08,17.84 | v40.21,16.31 40.08,16.31
  Route2 0.305: J2.1 40.08,17.84 40.08,16.31 40.08,15.78 39.15,14.84 v39,14.84
  Route15 0.152: v7.29,2.14 7.75,2.14 v16.29,10.68
  Route15 0.305: U1.P$A22 28.14,17.26 v26.8,18.6 24.23,18.6 16.3,10.68 v16.29,10.68
  Bottom 0.152: 36.86,16.47 38.54,14.79 38.99,14.79 v39,14.84 | 36.86,16.47 32.44,20.89 29.7,20.89 27.41,18.6 v26.8,18.6 24.21,18.6 22.84,17.23 22.84,13.11 v23.45,12.5 | v35.64,14.94 35.64,15.25 36.86,16.47
  other vias: 40.08,24.15 29.71,17.26
D+  (via drill 0.35)
  Top 0.152: v24.67,9.76 24.82,9.76 25.73,10.68 U1.P$AD6 | v22.84,18.14 24.36,18.14 25.58,19.36 26.5,19.36 D3.4
  Route2 0.152: v24.67,9.76 25.07,10.16 25.07,14.24 22.84,16.47 v22.84,18.14
D-  (via drill 0.35)
  Top 0.152: v23.3,10.37 24.82,10.37 25.28,10.83 U1.P$AD4 | v25.89,22.72 25.89,22.29 26.64,21.54 D3.6
  Route2 0.152: v23.3,10.37 23.3,11.74 20.1,14.94 20.1,20.73 22.08,22.72 v25.89,22.72
DN
  Top 0.152: 23.75,27.75 23.3,27.75 23.14,27.9 23.14,28.51 J4.A7 | 23.75,27.75 24.06,28.05 24.06,28.51 J4.B7 | 23.75,27.75 24.06,27.44 24.06,21.5 D3.1
DP
  Top 0.152: J4.A6 23.45,28.66 23.45,29.27 23.3,29.42 22.69,29.42 22.54,29.27 22.54,28.66 J4.B6 22.54,28.51 22.54,20.73 23.75,19.52 24.06,19.52 D3.3
EPD_3V3  (via drill 0.35)
  Top 0.152: 11.56,15.55 11.56,15.86 J1.15 | v10.95,9.3 10.93,9.28 3.61,9.28 3.18,8.85 1.5,8.85 EPD_C5.1 | v10.65,15.55 11.56,15.55 | 11.56,15.55 J1.16 | v9.12,20.43 9.73,21.04 9.73,26.83 8.97,27.59 8.97,28.51 L5.1
  Top 0.305: Q1.3 40.57,6.38 39.77,6.38 v39.72,6.33 | C1-EP-DR.1 16.5,2.31 16.5,2.4 16.92,2.82 v16.92,3.93
  Route2 0.305: v39.72,6.33 39.31,5.92 18.92,5.92 16.94,3.93 v16.92,3.93
  Bottom 0.152: 11.26,9.3 11.71,9.3 17.05,3.97 v16.92,3.93 | 11.26,9.3 11.26,14.33 10.65,14.94 v10.65,15.55 9.12,17.08 v9.12,20.43 | 11.26,9.3 v10.95,9.3
EPD_DC  (via drill 0.35)
  Top 0.152: v26.35,9.76 26.65,10.07 26.65,10.68 U1.P$AD10 | v10.65,17.53 11.11,17.99 J1.11
  Route2 0.152: v26.35,9.76 25.58,9.76 24.97,9.15 23.6,9.15 22.08,10.68 22.08,11.59 19.64,14.03 14.15,14.03 v10.65,17.53
GDR  (via drill 0.35)
  Top 0.152: 13.54,27.75 10.65,27.75 Q3.1 | 13.54,27.75 15.07,27.75 R2_EP_DR.2 | v12.17,24.85 12.17,22.72 12.02,22.56 11.71,22.56 J1.2 | v13.39,26.07 13.39,26.53 13.54,26.68 13.54,27.75
  Route2 0.152: v13.39,26.07 v12.17,24.85
GND  (via drill 0.35)
  Top 0.152: J1.17 12.54,14.99 EPD_C7.2 | J1.MP2 8.92,10.26 8.52,9.86 v8.41,9.98
  Top 0.302: C18.1 42.38,3.15 C12.1 40.16,4.23 C7.1 | SW_ENT.1 24.45,4.78 | 24.45,4.78 25.62,4.78 27.85,2.54 TP_GND.TP 28.63,2.3 v29.71,3.38 29.71,4.84 C29.1 29.75,5.54 C14.1 32.8,8.6 35.4,8.6 C6.2 38.08,8.4 X1.4 38.39,8.38 X1.2 39.12,9.54 C32.1 37.7,12.46 v37.82,12.59 | C8.1 v43.13,30.25 42.34,30.25 C25.1 C33.1 39.78,31.33 38.78,32.33 C23.1 38.78,33.11 IC9.C3 | C24.2 30.1,33.39 C1.1 29.42,33.33 28.8,33.33 | 28.8,33.33 J4.SH1 | J4.A1_B12 27.05,29.18 J4.SH3 27.6,28.12 C11.1 28.59,27.02 C43.2 28.59,22.13 C17.1 28.41,21.95 C42.2 | R_TYPE_SEL.1 15.87,23.71 | 15.87,23.71 16.42,23.71 C10.1 16.99,23.14 C16.1 16.08,22.52 EPD_C10.1 15.96,21.91 15.96,20.48 | 15.96,20.48 16.09,20.34 C5.1 16.52,18.87 U3.1 16.66,18.77 U3.9 | EPD_C11.2 14.51,19.85 15.47,19.85 15.96,20.33 15.96,20.48 | 15.87,23.71 15.81,23.77 15.81,25.78 16.25,26.23 C20.1 16.25,27.61 15.52,28.34 R2_EP_DR.1 15.88,29.07 C21.1 | J1.8 10.55,19.49 10.44,19.61 10.44,20.11 10.51,20.18 v10.64,20.04 | SJ1.1 6.91,26.28 | 6.69,25.87 SJ1.1 | SJ1.1 6.69,26.07 | SJ1.1 8.92,24.27 J1.MP1 | U3.9 17.58,18.02 17.83,17.77 U3.6 | U3.9 17.41,17.81 16.88,17.27 U3.4 | U3.9 17.41,16.53 | 17.41,16.53 17.41,15.73 EPD_C9.2 18.19,13.04 19.09,12.14 TP_BAT_GND.TP | 17.41,16.53 16.18,15.3 EPD_C1.2 15.11,14.72 14.1,13.72 EPD_C7.2 15,12.52 C27.1 15.85,9.6 EPD_C6.2 15.94,8.51 EPD_C8.1 | C19.1 16.68,6.83 16.61,6.89 16.36,6.89 EPD_C8.1 | SW_UP.1 13.56,4.87 14.88,4.87 14.88,5.41 EPD_C8.1 | EPD_C5.2 2.51,7.83 2.55,7.79 2.76,7.79 R9.1 3.88,8.9 4.47,8.9 4.5,8.87 C37.1 7.12,8.87 v7.32,8.68 7.87,8.12 C39.1 8.67,6.56 8.67,6.53 8.92,6.27 EPD_C12.1 10.2,6.27 10.46,6.53 EPD_C2.1
  Top 0.302: C1-EP-DR.2 17.1,2.03 17.57,2.49 | 17.57,2.49 17.85,2.78 C31.1 | 22.47,5.93 19.73,5.93 19.33,5.53 R3.1 v19.34,4.38 | 22.47,5.93 24.36,5.93 24.45,5.84 24.45,4.78 | v22.38,7.09 22.47,7 22.47,5.93 | J2.5 J2.3 40.1,22.89 40.1,23.09 40.71,23.71 40.71,25.83 43.19,28.3 v43.19,28.5 | 28.8,33.33 28.8,28.48 30.71,26.57 30.71,23.71 C2.2 v30.48,24.03 | 36.69,31.39 IC9.C2 IC9.C1 IC9.B1 | J4.SH2 18.86,33.23 R2_USB.2 17.61,33.23 17.98,32.86 17.98,32.25 17.69,31.96 R1_USB.2 17.21,32.14 D4.1 | J4.SH4 19.51,29.18 J4.A12_B1 | IC3.9 IC3.8 | 17.57,2.49 19.09,2.49 v19.1,2.48 | C38.1 6.61,4.03 7.77,2.86 C30.1 | C38.1 4.74,4.43 IC1.D2 | C38.1 6.42,4.62 v6.42,4.97 v6.41,4.97
  Top 0.305: C22.1 33.56,24.68 32.27,23.39 v32.27,22.9 32.27,23.22 C3.1 32.87,23.34 32.45,22.92 C9.1 33.33,21.22 C4.2 33.66,20.43 C15.1 | U1.P$F23 29.55,15.51 U1.P$78 | U1.P$81 28.35,14.61 | 28.35,14.61 U1.P$82 28.66,14.01 U1.P$74 | U1.P$74 U1.P$81 | U1.P$81 U1.P$77 | U1.P$74 27.46,15.21 U1.P$76 | U1.P$74 U1.P$75 26.05,16.2 26.05,16.67 U1.P$B7 | U1.P$74 U1.P$80 U1.P$79 | U1.P$74 26.26,14.01 U1.P$83 | U1.P$84 U1.P$87 | U1.P$84 U1.P$88 | U1.P$74 U1.P$84 | U1.P$74 27.46,12.81 U1.P$89 | U1.P$85 U1.P$90 | U1.P$85 U1.P$86 | U1.P$74 27.75,14.01 28.35,14.61 | U1.P$74 U1.P$85
  Route2 0.152: v8.41,9.98 7.32,8.89 v7.32,8.68
  Route2 0.302: C43.2 30.34,23.75 C2.2 v30.48,24.03 32.27,24.03 v32.27,22.9 | C42.2 29.41,19.93 29.41,19.17 C13.1 | J1.8 14.12,19.49 14.36,19.73 EPD_C11.2 | v10.64,20.04 8.85,21.83 8.85,23.71 J1.MP1 | IC3.8 v22.38,7.09 | IC2.B1 36.88,13.54 v37.82,12.59 40.23,15 C34.1 | v43.19,28.5 43.19,30.19 v43.13,30.25 | D3.2 26.72,20.44 26.76,20.48 28.05,19.19 U1.P$77 | v19.1,2.48 19.1,4.14 v19.34,4.38 | v6.41,4.97 6.41,5.97 7.81,7.37 7.86,7.37 C39.1
  Route2 0.305: IC2.B3 36.82,13.6 36.88,13.54
  Route15 0.302: SW_DN.1 34.22,3.55 33.73,3.55 32.4,4.89 31.22,4.89 v29.71,3.38 | C24.2 35.72,32.31 36.26,31.77 IC9.B1 | X1.4 39.15,7.33 40.51,7.33 40.96,6.89 40.96,5.53 C7.1
  other vias: 35.45,4.78 31.18,32.31 36.26,31.79 28.59,25.5 28.41,20.93 29.42,19.16 11.57,19.49 14.39,19.73 8.92,23.78 20.14,7.1 36.88,13.6 41.37,15 24.14,20.44 38.39,8.09 39.91,4.48 7.87,7.35 35.88,13.6
  pour Bottom (isolate 0.254): 322 corners
HAPTIC_EN  (via drill 0.35)
  Top 0.152: v23.45,13.42 24.06,12.81 24.21,12.81 U1.P$U1 | v37.89,13.5 37.4,13.5 37.01,13.11 36.86,13.11 IC2.A1
  Route15 0.152: v23.45,13.42 25.58,11.29 35.67,11.29 v37.89,13.5
IMU_INT1  (via drill 0.35)
  Top 0.152: v20.71,10.68 20.86,10.83 20.86,11.74 23.14,14.03 23.91,14.03 24.21,13.72 U1.P$N1 | v18.73,8.69 19.18,8.24 19.49,8.24 IC3.5
  Route2 0.152: v18.73,8.69 v20.71,10.68
LX1  (via drill 0.35)
  Top 0.152: IC9.B3 IC9.B2 | v33.4,31.5 32.88,30.98 L7.1
  Route2 0.152: IC9.B2 36.61,31.74 33.64,31.74 v33.4,31.5
  other vias: 36.66,31.79
LX2  (via drill 0.35)
  Top 0.152: IC9.D2 IC9.D3 37.39,31.32 38.64,31.32 v38.72,31.4
  Top 0.305: v31.45,28.79 31.31,28.92 L7.2
  Route2 0.152: v38.72,31.4 35.65,28.32 31.93,28.32 v31.45,28.8
  Route2 0.305: v31.45,28.8 v31.45,28.79
N$1
  Top 0.152: U1.P$C1 24.21,16.31 22.23,16.31 17.66,20.89 16.59,20.89 C5.2
N$2  (via drill 0.35)
  Top 0.152: C17.2 29.5,21.02 27.77,19.29 27.77,18.6 27.11,17.94 25.58,17.94 | 25.58,17.94 25.12,17.94 24.71,17.53 U1.P$D2 | v21.93,21.65 21.32,22.26 21.32,23.02 X2.1 | v25.58,17.99 25.58,17.94
  Route2 0.152: v25.58,17.99 v21.93,21.65
N$3  (via drill 0.35)
  Top 0.152: v23.45,16.92 23.14,16.92 22.23,17.84 22.23,20.28 19.94,22.56 19.94,23.78 21.16,25 21.16,25.61 X2.2 | C18.2 40.12,2.52 v39.69,2.94
  Route2 0.152: v39.69,2.94 38.93,2.94 v36.46,5.42 | v34.35,7.08 25.92,15.51 U1.P$F2
  Route15 0.152: v36.46,5.42 34.79,7.08 v34.35,7.08
  Bottom 0.152: v23.45,16.92 24.82,15.55 U1.P$F2
  other vias: 24.71,15.51
N$4  (via drill 0.35)
  Route2 0.15: C9.2 32.01,21.93 32.01,14.63 31.15,13.76 U1.P$N24
  other vias: 31.84,22.11 30.71,13.76
N$5
  Top 0.305: C22.2 35.07,23.18 L1.2 34.65,22 34.97,22 35.16,21.81 35.16,21.32 C4.1 34.45,18.64 34.61,18.49 34.61,17.41 34.59,17.39 34.59,15.97 34.86,15.71 39.1,15.71 39.68,15.13 39.68,14.73 39.86,14.55 40.51,14.55 42.55,12.51 42.55,12.47 43.64,11.38 ANT1.1
N$6  (via drill 0.35)
  Top 0.152: C3.2 33.36,23.78 33.36,22.56 33.27,22.48 L1.1
  Route15 0.152: L1.1 33.27,17.82 30.31,14.85 30.31,14.91 U1.P$H23
  other vias: 33.27,22.38 30.21,15.01
N$7  (via drill 0.35)
  Top 0.152: L3.1 17.05,24.56 C10.2 17.6,23.14 C16.2 19.34,20.78 19.34,20.08 20.42,18.99 v20.85,18.99 | C15.2 32.66,20.45 32.11,20.36 v32.03,20.28
  Route2 0.152: v20.85,18.99 23.22,18.99 25.46,16.74 U1.P$B5
  Route15 0.152: C15.2 32.66,19.03 30.72,17.08 30.72,15.77 U1.P$E24
  Bottom 0.152: v32.03,20.28 32.01,20.28 29.11,17.38 26.19,17.38 25.58,16.77 U1.P$B5
  other vias: 25.46,16.76 32.66,19.52 30.71,15.76
N$8  (via drill 0.35)
  Top 0.152: C11.2 30.23,26.1 30.23,25.33 30.17,25.33 29.12,24.29 29.12,23.76 30.38,22.5 30.38,20.02 30.14,19.77 28.72,19.77 28.15,19.2 28.15,18.74 v28.47,18.41
  Route2 0.152: U1.P$D23 28.47,17.75 v28.47,18.41
  other vias: 30.21,16.01
N$9  (via drill 0.35)
  Top 0.15: C1.2 29.4,32.78 29.27,32.65 29.27,28.54 31.4,26.42 31.4,17.45 U1.P$B24 31.58,15.88 31.83,15.88 31.83,12.74 34.24,12.74 35.64,11.34 35.64,10.23 v35.73,10.14 | X1.1 39.54,7.9 v38.2,6.56
  Route2 0.15: v35.73,10.14 38.2,7.67 v38.2,6.56
N$10  (via drill 0.35)
  Route2 0.15: C2.1 30.76,17.81 U1.P$A23
  Route2 0.152: X1.3 37.05,10.89 34.2,10.89 33.37,11.73 v33.37,11.86 | v31.32,14.79 30.62,15.5 30.62,16.33 30.21,16.73 U1.P$A23
  Route15 0.152: v33.37,11.86 31.32,13.91 v31.32,14.79
  other vias: 30.76,23.15 30.21,17.26 38.4,9.54
N$11
  Top 0.152: L3.2 17.51,25 17.51,23.78 19.94,21.34 19.94,20.73 L2.2
N$13
  Top 0.152: R4.2 32.06,27.88 35.17,30.99 IC9.D1
N$14
  Top 0.152: R2.2 35.94,30.59 IC9.E1
N$19  (via drill 0.35)
  Top 0.152: v16.44,32.93 16.74,32.62 17.35,32.62 R1_USB.1 | v17.39,30.88 22.9,30.88 24.52,29.27 24.52,28.66 J4.A5
  Route15 0.152: v17.39,30.88 16.44,31.83 v16.44,32.93
N$20
  Top 0.152: L5.2 4.25,28.66 3.33,29.57 3.33,30.18 D5.2 3.33,30.34 3.33,31.71 4.7,33.08 12.78,33.08 13.39,32.47 13.39,28.96 13.09,28.66 11.56,28.66 10.95,29.27 C2-EP-DR.1 10.8,29.27 9.73,28.2 9.73,27.44 10.04,27.14 12.63,27.14 Q3.3
N$21
  Top 0.152: IC1.D1 3.79,5.04 3.64,5.04 3.33,5.34 3.33,7.78 3.49,7.93 R9.2
N$22
  Top 0.152: 11.87,31.55 11.87,32.01 D4.2 | 11.87,31.55 11.87,29.42 C2-EP-DR.2 | 11.87,31.55 7.9,31.55 7.29,32.16 5.16,32.16 D2.1
N$23  (via drill 0.35)
  Top 0.152: v13.85,10.98 13.85,10.83 14.76,9.91 14.76,8.69 EPD_C6.1 | v10.65,14.03 11.11,14.49 J1.18
  Route2 0.152: v13.85,10.98 10.8,14.03 v10.65,14.03
N$25  (via drill 0.35)
  Top 0.152: v9.12,15.25 9.12,19.52 11.11,21.5 J1.4 | v13.39,6.1 11.87,7.63 EPD_C2.2
  Bottom 0.152: v9.12,15.25 9.12,10.22 13.24,6.1 v13.39,6.1
N$26  (via drill 0.35)
  Top 0.152: R_TYPE_SEL.2 15.07,24.24 14.92,24.09 13.7,24.09 R1_EP_DR.1 14.18,24.75 v14.22,24.75
  Route15 0.152: v14.22,24.75 13.02,24.75 12.13,23.86 10.83,23.86 8.22,26.47 SJ1.2
  other vias: 8.22,26.5
N$28  (via drill 0.35)
  Top 0.152: v20.55,5.04 19.94,5.04 R3.2 | v22.08,9.15 21.62,9.15 21.16,8.69 IC3.1
  Route2 0.152: v20.55,5.04 19.03,5.04 17.2,3.21 16.74,3.21 16.29,3.67 16.29,4.73 20.71,9.15 v22.08,9.15
N$29
  Top 0.152: EPD_C7.1 14,12.5 13.39,12.5 12.02,13.88 11.71,13.88 J1.19
N$30
  Top 0.152: J1.5 11.71,20.89 12.02,20.89 13.24,19.67 13.24,16.16 14,15.4 EPD_C1.1
N$31
  Top 0.152: J1.20 11.71,13.42 12.02,13.42 13.24,12.2 13.24,8.24 14.92,6.56 EPD_C8.2
N$32
  Top 0.152: C13.2 29.42,17.98 U1.P$A18
N$33  (via drill 0.35)
  Top 0.152: v12.63,11.29 12.63,11.9 12.02,12.5 11.71,12.5 J1.22 | v14.46,20.58 14.46,21.95 14.61,22.11 EPD_C10.2
  Route15 0.152: v12.63,11.29 12.63,13.57 14.46,15.4 v14.46,20.58
N$35
  Top 0.152: EPD_C12.2 9.58,7.32 9.89,7.32 11.56,9 11.56,11.44 J1.24
N$36
  Top 0.152: C32.2 37.32,10.98 37.32,12.05 36.4,12.96 36.4,13.11 IC2.A2
N$41  (via drill 0.35)
  Top 0.152: v14.92,29.42 14.46,29.88 14.46,32.62 15.52,33.69 17.35,33.69 R2_USB.1 | v17.51,28.51 17.96,28.51 18.73,27.75 21.32,27.75 21.47,27.9 21.47,28.51 J4.B5
  Route2 0.152: v14.92,29.42 16.59,29.42 v17.51,28.51
OUT+  (via drill 0.35)
  Top 0.152: v37.32,9.61 35.95,10.98 35.95,13.11 IC2.A3 | TP_OP.TP 38.49,3.62 v39.15,4.28
  Route2 0.152: v37.32,9.61 40.37,6.56 40.37,5.5 v39.15,4.28
OUT-
  Top 0.152: IC2.C3 35.79,14.18 34.57,14.18 33.2,15.55 TP_ON.TP
P0.13  (via drill 0.35)
  Top 0.152: R5.1 8.21,1.84 8.21,2.6 C30.2 8.21,2.75 9.43,3.97 9.43,4.12 10.04,4.73 10.65,4.73 SW_UP.2 10.8,4.88 v10.8,6.1 | v20.71,9.76 22.99,9.76 23.6,9.15 24.97,9.15 25.28,9.46 25.28,9.61 26.19,10.52 26.19,10.68 U1.P$AD8
  Route2 0.152: v20.71,9.76 17.66,6.71 11.41,6.71 v10.8,6.1
P0.14  (via drill 0.35)
  Top 0.305: SW_ENT.2 21.04,4.26 20.44,4.26 19.81,3.63 R8.1 18.34,3.63 C31.2
  Route15 0.15: SW_ENT.2 26.45,9.68 U1.P$AC9
  other vias: 21.55,4.78 26.46,11.26
P1.01  (via drill 0.35)
  Top 0.305: Q1.1 42.24,7.69 42.24,7.82 41.03,9.03 R_PWR_EPD.1 40.41,10.63 v40.18,10.86
  Route2 0.305: U1.P$Y23 39.03,12.01 v40.18,10.86
  other vias: 30.21,12.01
P1.02
  Top 0.305: SW_DN.2 32.09,5.34 R7.1 30.58,5.34 C29.2
PMIC_INT  (via drill 0.35)
  Route2 0.152: v9.59,7.81 10.84,7.81 v10.85,7.8 | v14.18,9.39 18.83,9.39 18.85,9.41 v18.9,9.41 | v23.86,11.62 23.86,11.86 24.34,12.34 24.34,12.94 24.41,13.01 U1.P$T2
  Route15 0.152: IC1.A1 7.99,6.21 v9.59,7.81 | v10.85,7.8 12.59,7.8 v14.18,9.39 | v18.9,9.41 21.65,9.41 v23.86,11.62
  other vias: 3.76,6.21 24.71,13.01
PREVGH  (via drill 0.35)
  Top 0.152: v10.65,12.96 11.56,12.96 J1.21 | v15.37,13.27 17.05,14.94 EPD_C9.1 | v3.18,27.9 3.18,26.83 D5.1
  Route2 0.152: v10.65,12.96 12.02,11.59 12.02,10.98 12.63,10.37 14.15,10.37 15.37,11.59 v15.37,13.27
  Bottom 0.152: v3.18,27.9 5.47,27.9 8.51,24.85 8.51,16.77 10.04,15.25 10.04,13.57 v10.65,12.96
PREVGL  (via drill 0.35)
  Top 0.152: v10.65,12.05 11.56,12.05 J1.23 | v13.85,16.47 13.85,18.14 14.31,18.6 EPD_C11.1 | v12.78,29.27 12.78,32.62 12.63,32.77 11.11,32.77 10.65,32.32 8.67,32.32 D2.2
  Route15 0.152: v10.65,12.05 13.85,15.25 v13.85,16.47
  Bottom 0.152: v12.78,29.27 12.78,17.53 v13.85,16.47
RESE
  Top 0.152: 13.54,23.48 12.17,22.11 11.71,22.11 J1.3 | 13.54,23.48 13.09,23.94 13.09,24.85 11.56,26.37 10.65,26.37 Q3.2 | 13.54,23.48 R1_EP_DR.2
SCL  (via drill 0.35)
  Top 0.152: v22.99,8.85 22.69,8.54 22.23,8.54 21.93,8.24 21.16,8.24 IC3.12 | v19.33,14.64 19.33,17.69 18.88,18.14 18.42,18.14 U3.7 | v33.81,25.31 33.66,25.31 33.05,24.7 32.75,24.7 31.83,25.61 31.83,26.64 R4.1 | 36.88,14.18 38.08,14.18 38.99,13.27 38.99,12.05 TP_SCL.TP
  Top 0.305: IC2.C1 36.88,14.18 36.88,14.98 v36.83,15.02 | R17.2 39.48,11.51 TP_SCL.TP
  Route2 0.152: v19.33,14.64 19.68,14.64 v20.74,13.58
  Route2 0.305: v36.83,15.02 36.83,20.21 35.78,21.25 35.78,25.2 35.51,25.48 33.98,25.48 v33.81,25.31
  Route15 0.152: v19.33,14.64 19.33,15.25 20.4,16.31 20.4,16.92 25.58,22.11 30.61,22.11 v33.81,25.31 | IC3.12 19.73,6.69 12.78,6.69 7.46,1.36 7.46,1.25 6.76,1.25 6.58,1.43 6.05,1.43 5.99,1.38 5.68,1.38 5.48,1.58 5.06,1.58 4.71,1.92 4.44,1.92 4.03,2.33 4.03,5.52 3.76,5.8 IC1.B1 | v20.74,13.58 21.71,13.58 22.49,14.36 24.31,14.36 24.68,13.98 U1.P$M2
  Bottom 0.152: v22.99,8.85 21.47,7.32 20.1,7.32 19.33,8.09 v19.33,14.64
  other vias: 21.16,8.12 3.76,5.81 24.71,14.01
SDA  (via drill 0.35)  (1 unrouted)
  Top 0.152: 23.14,14.49 v21.01,16.62 18.88,18.75 18.42,18.75 U3.8 | 23.14,14.49 23.3,14.33 24.21,14.33 U1.P$L1 | 23.14,14.49 20.55,11.9 20.55,11.59 20.1,11.13 20.1,9.46 20.55,9 20.55,8.69 IC3.2 | v35.34,16.77 35.49,16.92 40.52,16.92 40.82,16.62 40.82,15.55 40.37,15.1 40.21,15.1 R18.2 | v35.03,9.3 34.42,9.91 33.66,9.91 TP_SDA.TP
  Top 0.305: R2.1 34.08,29.01 32.95,27.88 32.95,25.51 v32.87,25.43
  Route2 0.152: v6.09,1.86 7.07,2.84 7.07,3.1 8.11,4.14 9.12,4.14 10.17,5.19 15.68,5.19 v16.11,5.62 v16.11,5.61
  Route2 0.305: v33.01,13.64 33.01,13.68 32.95,13.73 32.95,25.35 v32.87,25.43
  Route15 0.152: IC1.C1 6.08,3.09 v6.08,1.87 v6.09,1.86 | v16.11,5.61 16.85,6.35 21.23,6.35 21.42,6.55 21.42,8.23 21.03,8.63 20.65,8.63 IC3.2
  Bottom 0.152: v35.34,16.77 32.9,14.33 32.9,13.72 v33.01,13.64 32.9,13.57 35.03,11.44 v35.03,9.3 | v21.01,16.62 21.01,17.23 25.89,22.11 29.39,22.11 32.75,25.46 v32.87,25.43
  other vias: 3.76,5.41 20.64,8.64
SWDCLK
  Top 0.305: U1.P$AA24 30.8,11.67 30.87,11.67 30.9,11.64 31.71,11.64 TP_SWDCLK.TP
SWDIO
  Top 0.152: U1.P$AC24 30.61,11.29 30.61,9.46 30,8.85 TP_SWDIO.TP
SWO  (via drill 0.35)
  Top 0.302: TP_SWO.TP 28.37,4.97 v28.37,9.06
  Route15 0.302: v28.37,9.06 28.37,9.41 29.72,10.76 U1.P$AD22
  other vias: 29.71,10.76
VBAT  (via drill 0.35)
  Top 0.152: U3.2 16.44,18.14 16.44,17.84 U3.3 16.29,17.69 15.98,17.69 15.22,16.92 v15.22,16.31 | C27.2 15.37,10.52 15.37,10.98 16.59,12.2 TP_VBAT.TP 16.74,12.35 v17.81,11.29 | C37.2 5.63,8.22 6.1,8.22 v6.13,8.19 5.87,7.93 v4.51,7.93
  Route2 0.152: IC1.C2 3.04,5.41 3.04,5.4 3.03,5.4 2.51,5.92 v4.51,7.93
  Route15 0.152: v6.13,8.19 6.29,8.03 11.97,8.03 14.63,10.69 14.63,14.94 15.13,15.44 15.13,16.19 v15.22,16.31
  Bottom 0.152: v15.22,16.31 15.22,14.33 17.81,11.74 v17.81,11.29
  other vias: 4.16,5.41
VBUS  (via drill 0.35)
  Top 0.152: 27.72,25.37 C43.1 27.59,25.33 25.92,23.67 v25.89,23.63 | v21.47,11.29 23.3,11.29 23.75,10.83 24.67,10.83 U1.P$AD2 | v9.12,5.34 8.21,4.43 C38.2 7.09,4.54 v7.09,5.53 | v21.77,26.83 18.27,26.83 16.9,28.2 16.9,29.27 C21.2
  Top 0.302: C42.1 27.85,20.74 | 27.85,20.74 27.55,20.44 D3.5 | 27.85,20.74 27.85,21.74 25.92,23.67 | J4.A4_B9 25.9,28.38 25.9,26.88 27.28,25.5 C43.1
  Route2 0.15: J4.A9_B4 20.88,27.72 v21.77,26.83
  Route2 0.152: v9.12,5.34 13.85,10.07 19.18,10.07 20.4,11.29 v21.47,11.29
  Route15 0.152: IC1.A2 4.84,5.53 v7.09,5.53
  Bottom 0.152: v21.47,11.29 21.47,15.25 20.4,16.31 20.4,17.23 25.28,22.11 25.28,23.02 25.43,23.17 | v25.89,23.63 25.43,23.17 | 25.43,23.17 v21.77,26.83
  other vias: 4.16,6.21 20.88,28.6
VREG  (via drill 0.35)
  Top 0.152: C39.2 6.84,7.32 5.77,7.32 4.25,5.8 IC1.B2
  Top 0.305: TP_VREG.TP 40.37,32.68 39.44,33.61 C23.2 38.48,33.61 IC9.A3 36.87,32.19 36.86,32.18 36.85,32.19 IC9.A2 IC9.A1 32.3,32.19 C24.1 32.18,33.27 32.39,33.48 v34,33.48
  Route2 0.305: v34,33.48 32.79,32.26 16.77,32.26 9.94,25.43 9.94,24.07 v10.04,23.96 | v9.94,19.78 9.94,10.19 5.56,5.81 IC1.B2
  Route15 0.305: v9.94,19.78 9.94,23.86 v10.04,23.96
  other vias: 4.16,5.81